# EAGLE board ELE-T302 (EAGLE 4.11)
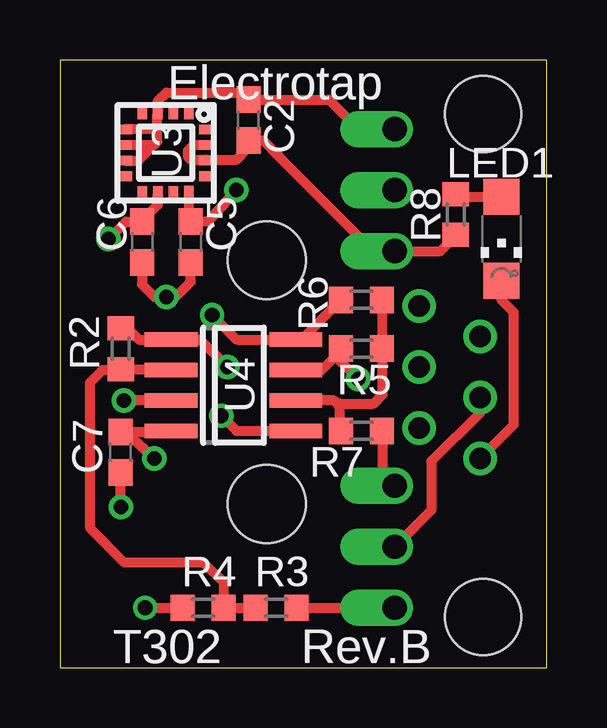
[diagram p0: board, top side]
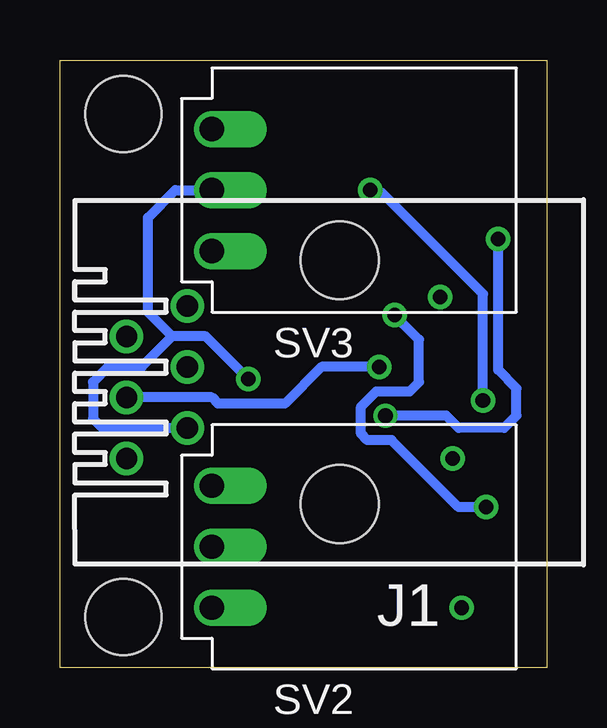
[diagram p1: board, bottom side, seen from below]

Size 20.3 x 25.32 mm. Coordinates in mm from the lower left corner, seen from the top.
Outline: 0,0 20.3,0 20.3,25.32 0,25.32 0,0
Copper layers (1*16): Top 0.035mm / dielectric 1.5mm / Bottom 0.035mm
Design rules "default": minimum track width 10mil, minimum drill 24mil, track to track 8mil, track to pad 8mil, pad to pad 8mil, via to via 8mil, smd to smd 8mil, copper to edge 40mil, drill to drill 8mil, minimum pad ring 10mil, minimum via ring 8mil, stop-mask expansion 4mil, vias tented up to drill 0mil, thermal gap 10mil
Holes 3.17 mm at 17.65,2.12 17.65,23.08

## Footprints (pad centres in the part's own frame; a part is rotated, then mirrored left to right if it is on the bottom)
C0603 = smd 1.1 x 1: 1 -0.85,0; 2 0.85,0
TELEPHONE_JACK = drill 0.889 round: 1 -3.175,8.89; 2 -1.905,6.35; 3 -0.635,8.89; 4 0.635,6.35; 5 1.905,8.89; 6 3.175,6.35 | hole 3.251: -5.08,0; 5.08,0
CHIPLED_1206 = smd 1.5 x 1.5: A 0,-1.75; C 0,1.75
R0603 = smd 1 x 1.1: 1 -0.85,0; 2 0.85,0
JACK_MOLEX_3PIN_RA = drill 1.016 offset: 5V 0,0; GND 0,5.08; SENSOR 0,2.54
LFCSP = smd 0.6 x 0.4: 1 0.3,2.975; 2 0.3,2.325; 3 0.3,1.675; 4 0.3,1.025; 9 3.7,1.025; 10 3.7,1.675; 11 3.7,2.325; 12 3.675,2.975 | smd 0.4 x 0.6: 5 1.025,0.3; 6 1.675,0.29; 7 2.325,0.3; 8 2.975,0.3; 13 2.975,3.7; 14 2.325,3.7; 15 1.675,3.7; 16 1.025,3.7
SOIC8 = smd 0.6 x 2.2: 1 -1.905,-2.6; 2 -0.635,-2.6; 3 0.635,-2.6; 4 1.905,-2.6; 5 1.905,2.6; 6 0.635,2.6; 7 -0.635,2.6; 8 -1.905,2.6

## Placement (x,y rotation side)
C2  0.1uF  [C0603]  7.87,22.82 90 top
C5  0.1uF  [C0603]  5.46,17.74 270 top
C6  0.1uF  [C0603]  3.42,17.74 270 top
C7  0.1uF  [C0603]  2.54,8.98 90 top
J1  [TELEPHONE_JACK]  8.63,11.9 90 bottom
LED1  [CHIPLED_1206]  18.41,17.87 180 top
R2  0/34K  [R0603]  2.54,13.3 90 top
R3  NC/10K  [R0603]  9.01,2.5 0 top
R4  NC/10K  [R0603]  5.96,2.5 0 top
R5  0/34K  [R0603]  12.57,13.3 180 top
R6  NC/10K  [R0603]  12.57,15.33 180 top
R7  NC/10K  [R0603]  12.57,9.87 180 top
R8  1K  [R0603]  16.51,18.88 270 top
SV2  JACK_MOLEX_3PINRA_MALE  [JACK_MOLEX_3PIN_RA]  13.96,2.5 0 bottom
SV3  JACK_MOLEX_3PINRA_MALE  [JACK_MOLEX_3PIN_RA]  13.96,17.36 0 bottom
U3  ADXL320  [LFCSP]  2.41,23.46 270 top
U4  OPAMP-AD8606  [SOIC8]  7.23,11.77 270 top

## Library data of the parts
C2 C5-C7 J1 SV2 SV3 U3 U4 = TEABOX-LIB
LED1 = led
R2-R8 = rcl

## Nets
+5V: C2.1 C7.1 J1.6 R3.2 R6.2 R8.2 SV2.5V SV3.5V U3.14 U3.15 U4.8
GND: C2.2 C5.2 C6.2 C7.2 J1.1 LED1.C R4.1 R7.1 SV2.GND SV3.GND U3.3 U3.5 U3.6 U3.7 U4.4
N$4: C5.1 U3.12 U4.3
N$5: J1.2 R5.2 SV3.SENSOR U4.7
N$6: J1.3 R2.2 SV2.SENSOR U4.1
N$8: C6.1 U3.10 U4.5
N$12: R5.1 R6.1 R7.2 U4.6
N$13: R2.1 R3.1 R4.2 U4.2
N$14: LED1.A R8.1

## Tracks (layer width: path | path; a pad name or v marks a point on that pad's centre or on a via)
+5V  (via drill 0.61)
  Top 0.406: 10.54,13.68 U4.8 9.65,13.68 | R8.2 16.51,18 15.87,17.36 SV3.5V 13.84,17.36 13.71,17.49 12.95,17.49 9.14,21.3 | U3.15 5.56,21.78 5.33,21.55 5.33,21.3 5.46,21.17 6.09,21.17 | 6.09,21.17 6.11,21.15 U3.14 | 9.14,21.3 9.1,21.34 | 6.09,21.17 7.36,21.17 7.87,21.68 C2.1 8.46,21.97 9.14,21.3 | 9.65,13.68 7.36,13.68 v6.34,14.69 | R6.2 10.07,13.68 9.65,13.68 | R3.2 SV2.5V 14.09,2.63 | v2.54,6.69 C7.1
  Bottom 0.406: v6.34,14.69 5.33,13.68 5.33,11.9 5.71,11.52 7.11,11.52 7.74,10.88 7.74,9.74 7.49,9.49 6.47,9.49 3.68,6.69 v2.54,6.69
GND  (via drill 0.61, 0.61 pad 0.41)
  Top 0.406: U4.4 4.69,9.87 4.66,9.83 2.62,9.83 | C7.2 2.62,9.83 | 2.62,9.83 2.54,9.87 2.66,9.87 v3.93,8.72 | LED1.C 18.41,15.33 18.92,14.82 18.92,10.12 J1.1 | U3.7 3.26,21.13 4.06,21.93 | 4.08,23.1 4.06,23.08 4.06,22.57 | 4.08,23.1 U3.3 | 4.06,21.93 4.06,22.57 | U3.6 3.91,21.78 4.06,21.93 | U3.5 3.92,22.43 4.06,22.57 | 4.08,23.1 4.08,23.61 4.44,23.96 7.49,23.96 7.74,23.71 C2.2 11.21,23.67 12.44,22.44 SV3.GND | C5.2 5.46,16.09 4.82,15.46 v4.44,15.46 3.93,15.46 3.42,15.96 C6.2 | SV2.GND 13.46,7.58 13.46,10.08 R7.1 | 5.2,2.5 R4.1 v3.55,2.5
N$4  (via drill 0.61)
  Top 0.254: C5.1 5.46,18.76 5.38,18.7
  Top 0.406: 5.38,18.7 U3.12 | C5.1 6.18,18.59 v7.36,19.9 | 4.69,11.14 U4.3 v2.66,11.14
  Bottom 0.406: v7.36,19.9 6.85,19.77 2.66,15.58 v2.66,11.14
N$5  (via drill 0.61)
  Top 0.406: 11.72,13.21 R5.2 | U4.7 10.92,12.41 11.72,13.21 | 11.72,13.21 11.72,12.75 v12.44,12.03
  Bottom 0.406: v12.44,12.03 14.22,13.8 15.62,13.8 | 15.62,13.8 16.89,12.54 18.28,12.54 18.92,11.9 18.92,10.38 18.54,9.99 J1.2 | SV3.SENSOR 15.49,19.9 16.63,18.76 16.63,14.82 15.62,13.8
N$6  (via drill 0.61 pad 0.41)
  Top 0.254: R2.2 2.96,14.02
  Top 0.406: 2.96,14.02 3.3,13.68 U4.1 5.84,13.68 v6.98,12.54 | J1.3 17.52,10.63 15.49,8.6 15.49,6.57 SV2.SENSOR
  Bottom 0.406: v6.98,12.54 9.39,12.54 10.92,11.01 13.71,11.01 13.96,11.27 J1.3
N$8  (via drill 0.61)
  Top 0.406: U3.10 4.08,19.29 3.42,18.63 C6.1 2.75,18.59 v2.03,17.87 | v6.73,10.5 7.36,9.87 U4.5
  Bottom 0.406: v2.03,17.87 2.03,12.41 1.27,11.65 1.27,10.5 1.77,9.99 3.68,9.99 4.19,10.5 v6.73,10.5
N$12
  Top 0.406: R6.1 13.46,15.29 13.46,13.3 R5.1 13.46,13.26 13.46,11.39 13.08,11.01 11.68,11.01 11.61,10.95 | U4.6 11.42,11.14 11.61,10.95 | 11.61,10.95 11.68,10.88 11.68,9.87 R7.2
N$13
  Top 0.254: 3.72,12.45 3.81,12.41 U4.2
  Top 0.406: 3.72,12.45 R2.1 2.54,12.41 1.77,12.41 1.27,11.9 1.27,5.8 2.66,4.41 5.96,4.41 6.81,3.56 R4.2 R3.1 8.25,2.5
N$14
  Top 0.406: R8.1 16.63,19.77 16.79,19.62 LED1.A

## Text on the board
tPlace: Electrotap | T302 | Rev.B
_tplace: Electrotap | U3 | C2 | C6 | C5 | R8 | LED1 | R6 | R5 | R2 | U4 | R7 | C7 | R4 | R3 | T302 | Rev.B
_bplace: SV3 | J1 | SV2